# Altium PCB PCB2.pcbdoc
Units mil, origin at the board's own origin, x right, y up, seen from the top; angles counter-clockwise.
Board outline 2162.5 x 1484.25 mil, 2 copper layers (Top Layer, Bottom Layer); 7 components, 4 nets, 16 pads, 0 vias.
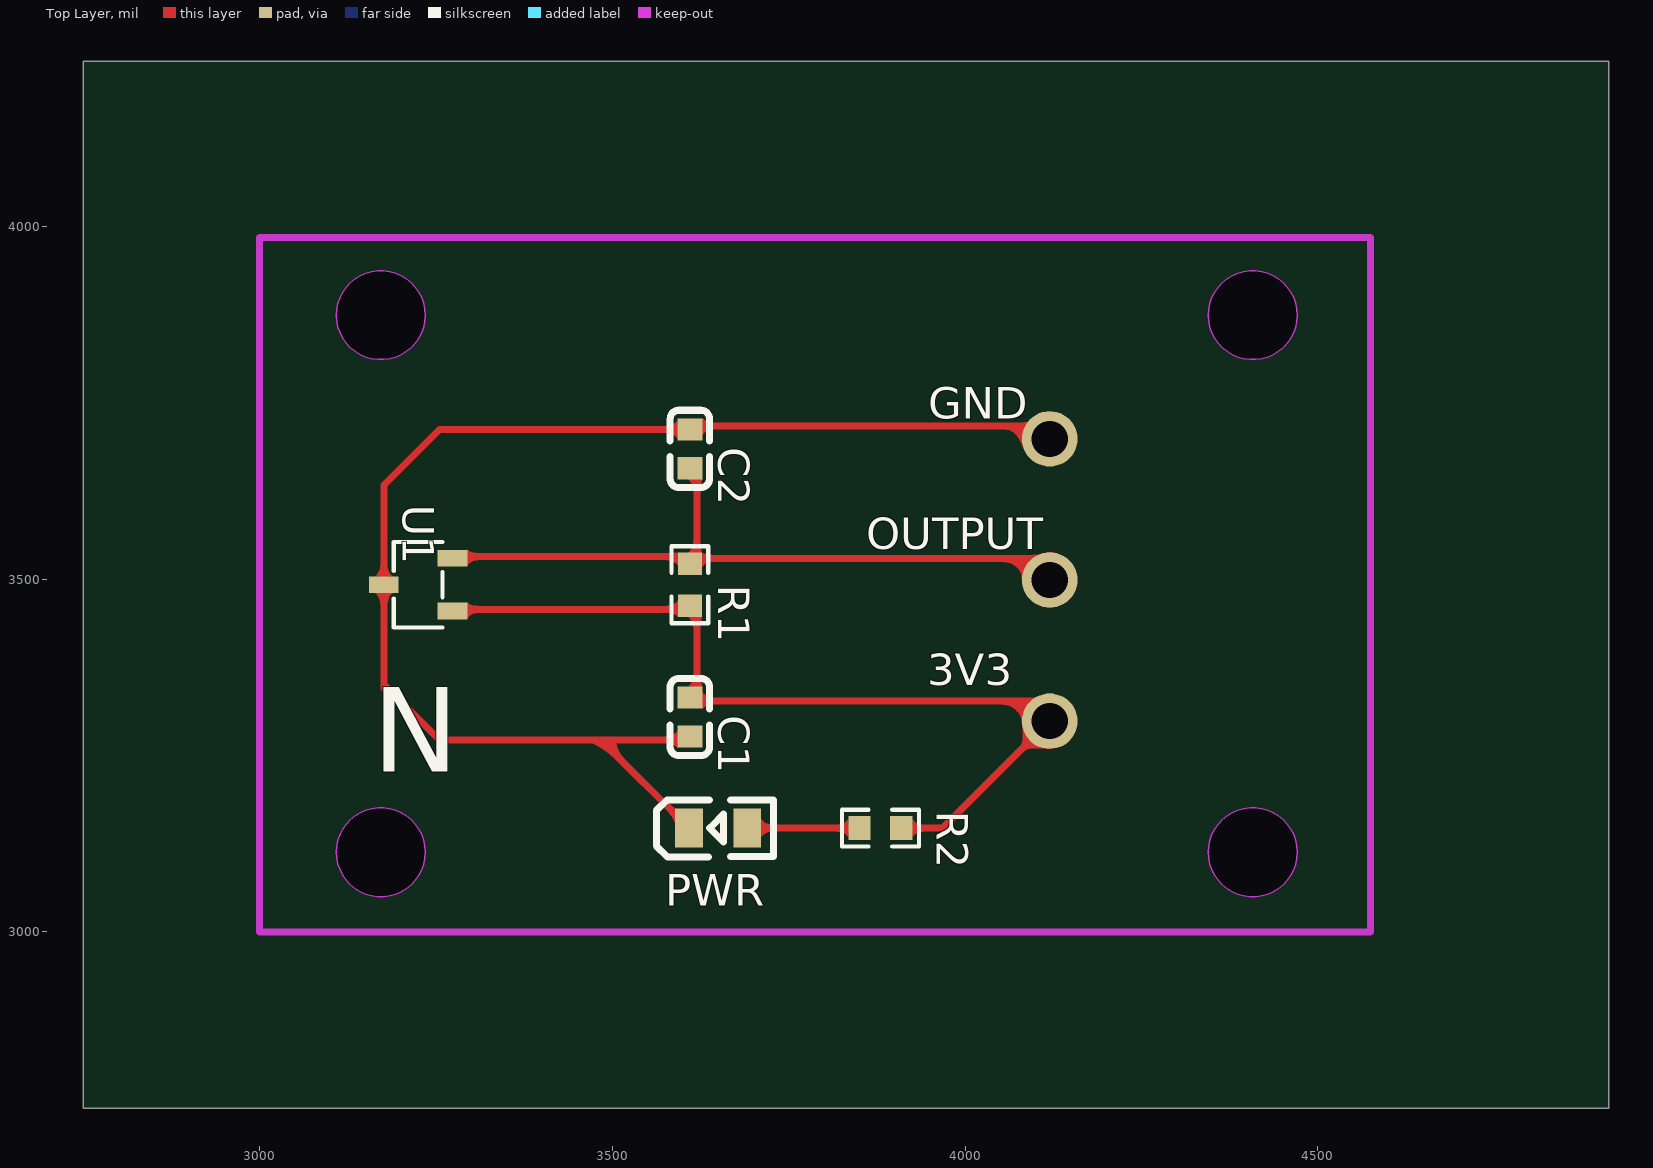
[diagram p0: Top Layer view]
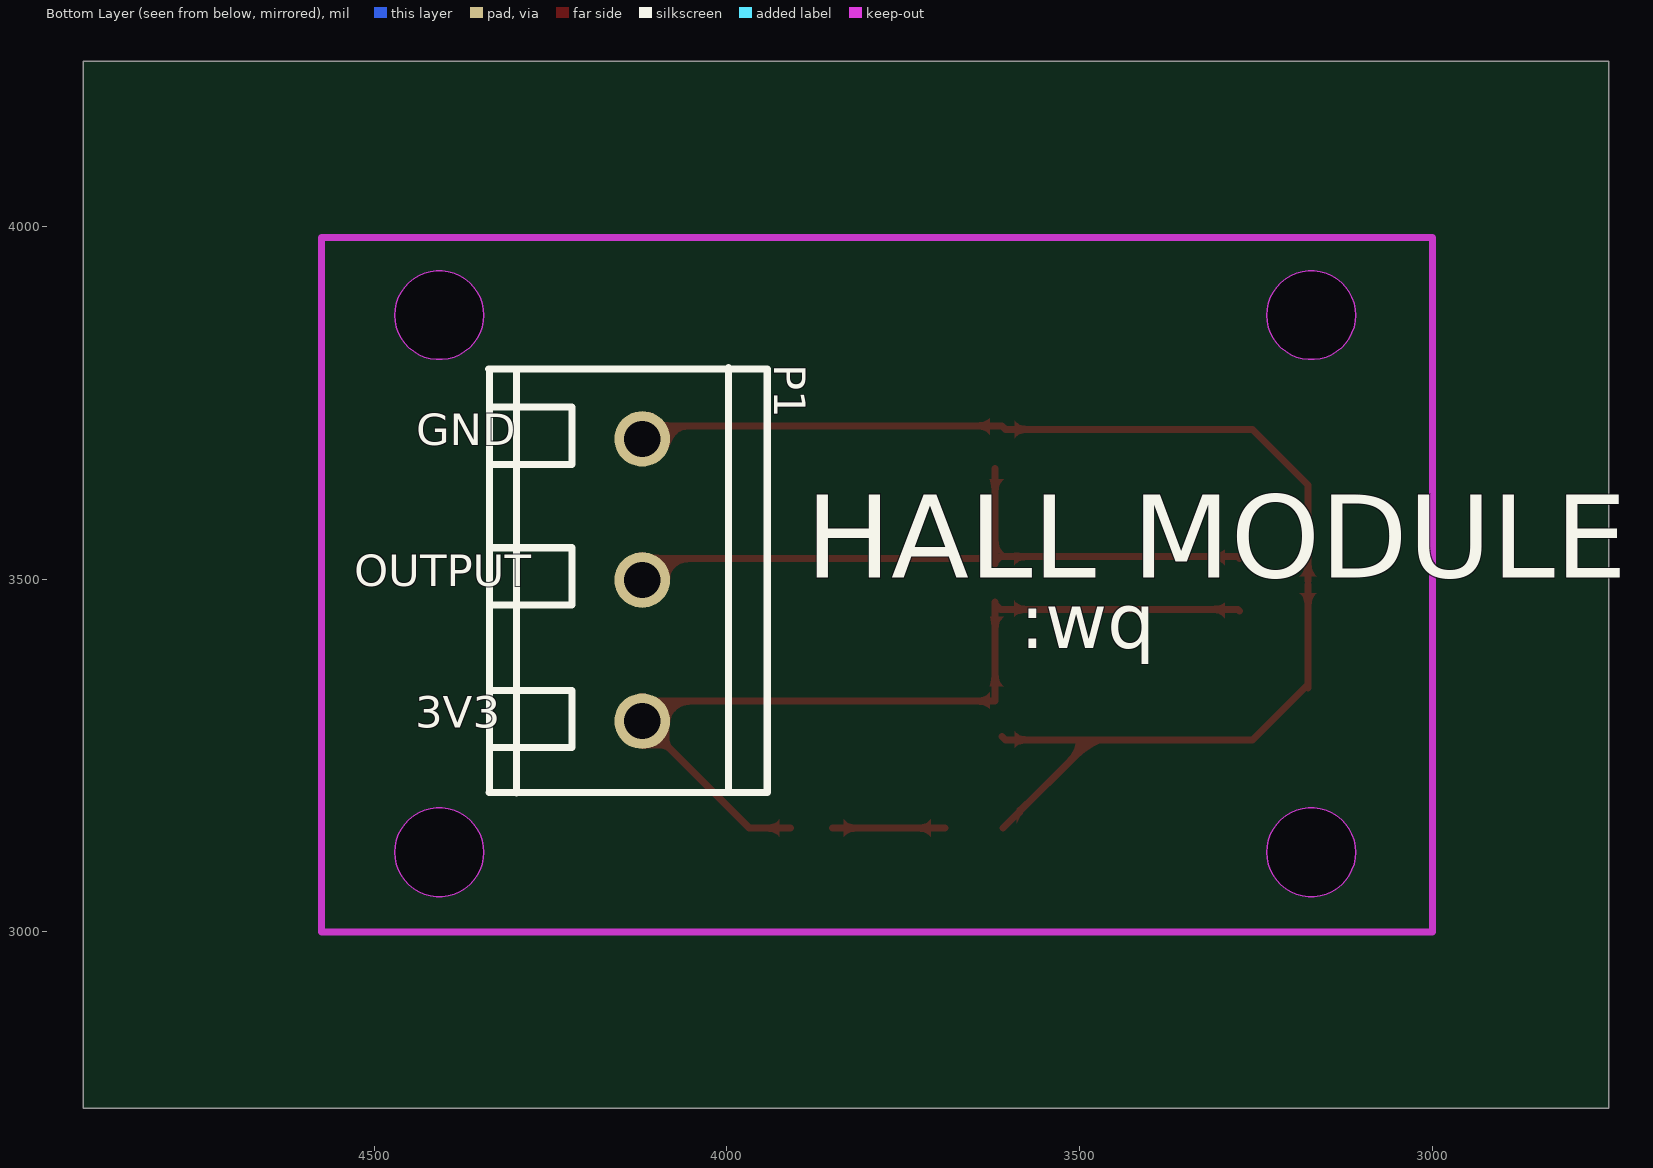
[diagram p1: Bottom Layer view, seen from below]

## Layer stack, top to bottom
Top Layer: signal copper (thickness not stored)
Dielectric: dielectric 12.6, FR-4, Dk 4.8
Bottom Layer: signal copper (thickness not stored)

## Board outline
4912.5,2750 2750,2750 2750,4234.25 4912.5,4234.25
cut-out: 3234.99,3874.13 cw(c3172,3874.13) 3109.01,3874.13 cw(c3172,3874.13)
cut-out: 3234.99,3113.05 cw(c3172,3113.05) 3109.01,3113.05 cw(c3172,3113.05)
cut-out: 4470.63,3874.13 cw(c4407.64,3874.13) 4344.64,3874.13 cw(c4407.64,3874.13)
cut-out: 4470.63,3113.05 cw(c4407.64,3113.05) 4344.64,3113.05 cw(c4407.64,3113.05)

## Design rules (kind name [scope] priority, off if disabled: settings)
BoardOutlineClearance copperThickness1oz [All] p0: genericclearance=10 ignorepadtopadclearanceinfootprint=FALSE except(0: Arc-SplitContinuation Track-SplitContinuation SMDPad-SplitContinuation THPad-SplitContinuation Via-SplitContinuation Fill-SplitContinuation Poly-SplitContinuation Region-SplitContinuation Text-SplitContinuation; 6: Track-CutoutEdge SMDPad-CutoutEdge THPad-CutoutEdge Via-CutoutEdge Region-CutoutEdge; 11.8: Track-OutlineEdge SMDPad-OutlineEdge THPad-OutlineEdge Via-OutlineEdge Fill-OutlineEdge Region-OutlineEdge Poly-OutlineEdge Text-OutlineEdge Fill-CutoutEdge)
BoardOutlineClearance copperThickness2oz [All] p0: genericclearance=10 ignorepadtopadclearanceinfootprint=FALSE except(0: Arc-SplitContinuation Track-SplitContinuation SMDPad-SplitContinuation THPad-SplitContinuation Via-SplitContinuation Fill-SplitContinuation Poly-SplitContinuation Region-SplitContinuation Text-SplitContinuation; 6: Track-CutoutEdge SMDPad-CutoutEdge THPad-CutoutEdge Via-CutoutEdge Region-CutoutEdge; 11.8: Track-OutlineEdge SMDPad-OutlineEdge THPad-OutlineEdge Via-OutlineEdge Fill-OutlineEdge Region-OutlineEdge Poly-OutlineEdge Text-OutlineEdge Fill-CutoutEdge)
Clearance copperThickness1oz [(InNet('VCC') OR InNet('GND') OR InNet('OUTPUT') OR InNet('$1N1036'))] p1: gap=7 ignorepadtopadclearanceinfootprint=FALSE except(4: Track-Track; 6: Track-SMDPad SMDPad-SMDPad Track-THPad SMDPad-THPad THPad-THPad Track-Via SMDPad-Via THPad-Via Via-Via SMDPad-Fill THPad-Fill Via-Fill Fill-Fill Track-Region SMDPad-Region THPad-Region Via-Region Region-Region Track-Poly SMDPad-Poly THPad-Poly Via-Poly Fill-Poly Region-Poly Poly-Poly Track-Text SMDPad-Text THPad-Text Via-Text Fill-Text Region-Text Poly-Text Text-Text; 6.9: Track-Hole SMDPad-Hole THPad-Hole Via-Hole Fill-Hole Region-Hole Poly-Hole Text-Hole Sheet-Hole; 11.8: Track-Fill Fill-Region Track-Sheet SMDPad-Sheet THPad-Sheet Via-Sheet Fill-Sheet Region-Sheet Poly-Sheet Text-Sheet)
Clearance copperThickness2oz [All] p1: gap=7 ignorepadtopadclearanceinfootprint=FALSE except(6: Track-SMDPad SMDPad-SMDPad Track-THPad SMDPad-THPad THPad-THPad Track-Via SMDPad-Via THPad-Via Via-Via SMDPad-Fill THPad-Fill Via-Fill Fill-Fill Track-Region SMDPad-Region THPad-Region Via-Region Region-Region Track-Poly SMDPad-Poly THPad-Poly Via-Poly Fill-Poly Region-Poly Poly-Poly Track-Text SMDPad-Text THPad-Text Via-Text Fill-Text Region-Text Poly-Text Text-Text; 6.9: Track-Hole SMDPad-Hole THPad-Hole Via-Hole Fill-Hole Region-Hole Poly-Hole Text-Hole Sheet-Hole; 8: Track-Track; 11.8: Track-Fill Fill-Region Track-Sheet SMDPad-Sheet THPad-Sheet Via-Sheet Fill-Sheet Region-Sheet Poly-Sheet Text-Sheet)
DiffPairsRouting differentialPair [All] p1: maxuncoupledlength=10 minlimit=6 maxlimit=6 mostfreqgap=6 toplayer_minwidth=5 toplayer_prefwidth=10 toplayer_maxwidth=100 bottomlayer_minwidth=5 bottomlayer_prefwidth=10 bottomlayer_maxwidth=100
PasteMaskExpansion pasteMaskExpansion [All] p1: expansion=0
PlaneConnect innerPlane [All] p1: planeconnectstyle=Relief reliefexpansion=20 reliefentries=4 reliefconductorwidth=10 reliefairgap=10
PolygonConnect copperRegion [All] p1: connectstyle=Relief reliefentries=4 reliefconductorwidth=10 polygonreliefangle="90 Angle" airgapwidth=10
RoutingVias viaSize [All] p1: viastyle="Through Hole" holewidth=12.0078 minholewidth=11.811 maxholewidth=248.0314 width=24.0158 minwidth=19.685 maxwidth=393.7008
SolderMaskExpansion solderMaskExpansion [All] p1: useseparateexpansions=TRUE expansion=2 expansionbottom=2
Width copperThickness1oz [All] p1: maxlimit=100 minlimit=5 preferedwidth=10
Width copperThickness2oz [All] p1: maxlimit=100 minlimit=8 preferedwidth=10

## Components (designator, comment, footprint, x,y, rotation, side; value= is the part's Value field where it differs from the comment)
C1 "CC0603KRX7R9BB103" C0603 3610,3304.63 r90 top
C2 "CL10B102KB8NNNC" C0603 3610,3684.63 r270 top
P1 "WJ500V-5.08-3P" CONN-TH_3P-P5.00_WJ500V-5.08-3P 4120,3498.73 r270 bottom
PWR "NCD0805R1" LED0805-R-RD 3650,3147.13 r0 top
R1 "RT0603BRD071KL" R0603 3610,3492.13 r270 top
R2 "RC0603FR-07100KL" R0603 3880,3147.13 r0 top
U1 "HX6286ESO" SOT-23-3_L2.9-W1.6-P1.90-LS2.8-BR 3225,3492.13 r0 top

## Footprints (in the part's own frame and the unit in brackets; to place one, negate y for a bottom-side part, rotate by r counter-clockwise, add the part's x,y. Pads: shape width x height; smd on the part's side, far side on the other; paste and mask are expansions set on the pad)
C0603 [mm]
  rect 0.8x0.9 smd: 1(-0.7,0) 2(0.7,0)
  silkscreen extent -1.39,-0.71 1.39,0.71
CONN-TH_3P-P5.00_WJ500V-5.08-3P [mm]
  round 2 hole 1.3: 1(-5.08,0) 2(0,0) 3(5.08,0)
  silkscreen extent -7.64,-5.53 7.66,4.5
LED0805-R-RD [mm]
  rect 1x1.4 smd: 1(1.05,0) 2(-1.05,0)
  silkscreen extent -2.22,-1.04 1.99,1.01
R0603 [mil]
  rect 31.75x34.02 smd: 1(-29.66,0) 2(29.66,0)
  silkscreen extent -55,-26 55,26
SOT-23-3_L2.9-W1.6-P1.90-LS2.8-BR [mm]
  rect 1.07x0.6 smd: 1(1.235,-0.95) 2(1.235,0.95) 3(-1.235,0)
  silkscreen extent -0.88,-1.54 0.88,1.54

## Nets (pads, with @x,y where several pads share a name; then routed paths per layer and width w, separated by ;. In a path a pad name is that pad's centre, name@x,y a point inside that pad or via, vN(x,y) a via of type N, cw(c..) or ccw(c..) an arc to the next point about the centre after c; other vN are vias at no path point)
$1N1036: PWR.1 R2.1 | length 159
  Top Layer w10: PWR.1 R2.1
GND: C1.1 C2.1 P1.1 PWR.2 U1.3 | length 1910.6
  Top Layer w10: 3176.38,3345.75 3176.38,3350.75 ; U1.3 3176.38,3350.75 ; U1.3@3176.38,3497.13 3176.38,3633.5 3255,3712.13 3604.94,3712.13 3610,3717.19 4109.04,3717.19 P1.1@4120,3706.23 ; PWR.2 3483.65,3272.13 ; C1.1 3605.06,3272.13 3483.65,3272.13 ; 3176.38,3350.75 3255,3272.13 3483.65,3272.13
OUTPUT: C2.2 P1.2 R1.1 U1.2 | length 995.4
  Top Layer w10: U1.2 3276.12,3532.03 3612.26,3532.03 R1.1@3620,3524.29 ; R1.1@3620,3521.79 R1.1@3620,3524.29 ; R1.1@3620,3529.29 4096.94,3529.29 P1.2@4120,3506.23 ; C2.2@3620,3657.07 R1.1@3620,3524.29
VCC: C1.2 P1.3 R1.2 R2.2 U1.1 | length 1272.7
  Top Layer w10: U1.1 3276.12,3457.23 3612.26,3457.23 R1.2@3620,3464.97 ; R1.2@3620,3467.47 R1.2@3620,3464.97 ; R2.2 3968.4,3147.13 P1.3 ; P1.3@4120,3306.23 4099.1,3327.13 3620,3327.13 R1.2@3620,3464.97

## Keep-outs
Board Outline Layer:
  circle w1: c3172,3874.13 r62.99
  region: 3234.99,3874.13 cw(c3172,3874.13) 3109.01,3874.13 cw(c3172,3874.13)
  circle w1: c3172,3113.05 r62.99
  region: 3234.99,3113.05 cw(c3172,3113.05) 3109.01,3113.05 cw(c3172,3113.05)
  circle w1: c4407.64,3874.13 r62.99
  region: 4470.63,3874.13 cw(c4407.64,3874.13) 4344.64,3874.13 cw(c4407.64,3874.13)
  circle w1: c4407.64,3113.05 r62.99
  region: 4470.63,3113.05 cw(c4407.64,3113.05) 4344.64,3113.05 cw(c4407.64,3113.05)
  lines w10: 3000,3000 4574.8,3000 4574.8,3984.25 3000,3984.25 3000,3000

## Other copper
Top Layer:
  region net VCC: 3615,3362.93 3625,3362.93 ccw(c3667.75,3362.93) 3627.72,3347.93 3607.5,3347.93 ccw(c3596.25,3362.93)
  region net VCC: 3642.72,3332.13 3642.72,3322.13 ccw(c3642.72,3299.5) 3627.72,3316.44 3627.72,3339.63 ccw(c3642.72,3350.88)
  region net GND: 3577.28,3267.13 3577.28,3277.13 ccw(c3577.28,3295.88) 3592.28,3284.63 3592.28,3261.32 ccw(c3577.28,3244.85)
  region net OUTPUT: 3625,3626.32 3615,3626.32 ccw(c3596.25,3626.32) 3607.5,3641.32 3627.72,3641.32 ccw(c3667.77,3626.32)
  region net GND: 3577.28,3707.13 3577.28,3717.13 ccw(c3577.28,3735.88) 3592.28,3724.63 3592.28,3699.63 ccw(c3577.28,3688.38)
  region net GND: 3642.72,3722.19 3642.72,3712.19 ccw(c3642.72,3693.44) 3627.72,3704.69 3627.72,3727.93 ccw(c3642.72,3744.63)
  region net VCC: 4053.1,3322.13 4095.7,3332.13 4098.18,3332.2 4100.35,3332.42 4102.27,3332.76 4103.97,3333.2 4106.91,3334.28 4109.5,3335.48 4112.08,3336.63 4115.01,3337.54 4116.71,3337.86 4118.62,3338.05 4120.79,3338.09 4123.26,3337.97 4080.66,3297.3 4080.41,3299.78 4079.88,3302.2 4079.08,3304.54 4078.02,3306.8 4076.73,3308.96 4075.24,3311.01 4073.55,3312.93 4071.69,3314.71 4069.69,3316.33 4067.55,3317.78 4065.3,3319.05 4062.96,3320.12 4060.55,3320.98 4058.09,3321.61 4055.6,3321.99
  region net VCC: 4085.63,3257.29 4078.56,3264.37 4079.66,3265.76 4080.51,3267.45 4081.15,3269.41 4081.58,3271.58 4081.85,3273.95 4081.97,3276.46 4081.88,3281.77 4081.5,3287.2 4081.05,3292.46 4080.72,3297.23 4080.71,3301.2 4122.47,3259.44 4118.5,3259.45 4113.73,3259.78 4108.47,3260.23 4103.04,3260.61 4097.73,3260.7 4095.22,3260.58 4092.85,3260.31 4090.68,3259.88 4088.72,3259.24 4087.03,3258.39
  region net OUTPUT: 4053.09,3524.29 4096.94,3534.29 4101.24,3534.51 4105.04,3535.08 4108.5,3535.86 4111.78,3536.68 4115.06,3537.42 4118.49,3537.9 4122.25,3538 4126.5,3537.56 4080.65,3500.06 4080.58,3502.67 4080.19,3505.18 4079.5,3507.56 4078.54,3509.83 4077.33,3511.96 4075.89,3513.96 4074.23,3515.8 4072.37,3517.49 4070.35,3519.01 4068.18,3520.36 4065.87,3521.52 4063.45,3522.5 4060.95,3523.27 4058.37,3523.83 4055.75,3524.17
  region net GND: 4055.6,3712.19 4083.28,3722.19 4086,3722.31 4088.33,3722.67 4090.33,3723.24 4092.05,3723.99 4093.54,3724.89 4094.86,3725.92 4097.22,3728.24 4099.56,3730.73 4100.86,3731.97 4102.31,3733.17 4103.99,3734.3 4105.93,3735.34 4108.19,3736.25 4110.84,3737.02 4083.16,3684.86 4081.09,3689.95 4078.73,3694.89 4076.02,3699.51 4074.53,3701.65 4072.92,3703.65 4071.21,3705.48 4069.38,3707.14 4067.42,3708.6 4065.34,3709.84 4063.12,3710.83 4060.76,3711.57 4058.26,3712.03
  region net VCC: 3577.99,3452.23 3577.99,3462.23 ccw(c3577.99,3480.98) 3592.99,3469.73 3592.99,3446.59 ccw(c3577.99,3429.45)
  region net VCC: 3625,3431.59 3615,3431.59 ccw(c3596.25,3431.59) 3607.5,3446.59 3627.01,3446.59 ccw(c3682.03,3431.59)
  region net OUTPUT: 3577.99,3527.03 3577.99,3537.03 ccw(c3577.99,3714.37) 3592.99,3537.66 3592.99,3519.53 ccw(c3577.99,3508.28)
  region net OUTPUT: 3615,3552.66 3625,3552.66 ccw(c3681.99,3552.66) 3627.01,3537.66 3607.5,3537.66 ccw(c3596.25,3552.66)
  region net OUTPUT: 3642.01,3534.29 3642.01,3524.29 ccw(c3642.01,3505.54) 3627.01,3516.79 3627.01,3537.66 ccw(c3642.01,3569.3)
  region net VCC: 3309.69,3462.23 3309.69,3452.23 ccw(c3309.69,3433.48) 3294.69,3444.73 3294.69,3466.54 ccw(c3309.69,3490.48)
  region net OUTPUT: 3309.69,3537.03 3309.69,3527.03 ccw(c3309.69,3508.28) 3294.69,3519.53 3294.69,3541.34 ccw(c3309.69,3565.28)
  region net GND: 3181.38,3465.32 3171.38,3465.32 ccw(c3152.62,3465.32) 3163.88,3480.32 3188.88,3480.32 ccw(c3200.12,3465.32)
  region net GND: 3171.38,3518.94 3181.38,3518.94 ccw(c3200.12,3518.94) 3188.88,3503.94 3163.88,3503.94 ccw(c3152.62,3518.94)
  region net VCC: 3940.54,3152.13 3940.54,3142.13 ccw(c3940.54,3123.38) 3925.54,3134.63 3925.54,3159.63 ccw(c3940.54,3170.88)
  region net $1N1036: 3819.46,3142.13 3819.46,3152.13 ccw(c3819.46,3170.88) 3834.46,3159.63 3834.46,3134.63 ccw(c3819.46,3123.38)
  region net GND: 3502.79,3245.91 ccw(c3431.58,3174.7) 3471.58,3267.13 3483.65,3272.13 3505.72,3267.13 ccw(c3545.72,3274.7) 3516.93,3245.91
  region net $1N1036: 3726.03,3152.13 3726.03,3142.13 ccw(c3726.03,3123.38) 3711.03,3134.63 3711.03,3159.63 ccw(c3726.03,3170.88)
  region net GND: 3581.07,3167.63 3577.96,3184.89 ccw(c3719.86,3326.79) 3588.97,3174.68 3588.97,3154.31 ccw(c3558.99,3145.55)

## Silkscreen, mask and mechanical layers (free items; w line width, h text height)
Top Silkscreen Layer:
  text "GND" at 3947.9,3727.13 h44.88
  text "OUTPUT" at 3860,3542.13 h44.88
  text "3V3" at 3946.6,3349.69 h44.88
  text "N" at 3160,3227.13 h120
Bottom Silkscreen Layer:
  text "GND" at 4440.26,3689.63 h44.88
  text "HALL MODULE" at 3888.2,3502.13 h118.11
  text "OUTPUT" at 4527.86,3489.63 h44.88
  text ":wq" at 3585,3402.13 h78.74
  text "3V3" at 4441.56,3289.63 h44.88
Mechanical Layer:
  circle w1: c3172,3874.13 r62.99
  circle w1: c3172,3113.05 r62.99
  circle w1: c4407.64,3874.13 r62.99
  circle w1: c4407.64,3113.05 r62.99